# EAGLE board breakoutboard (EAGLE 5.00)
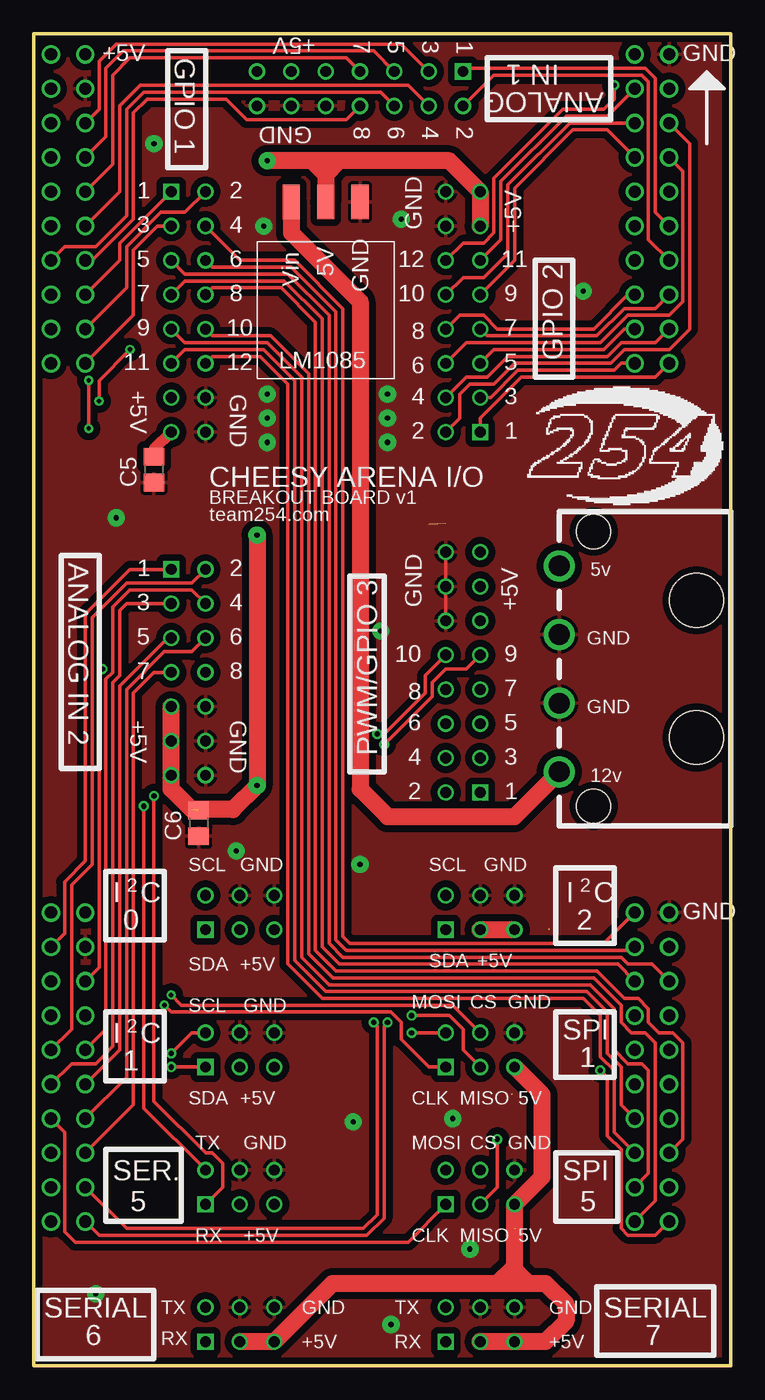
[diagram p0: board, top side]
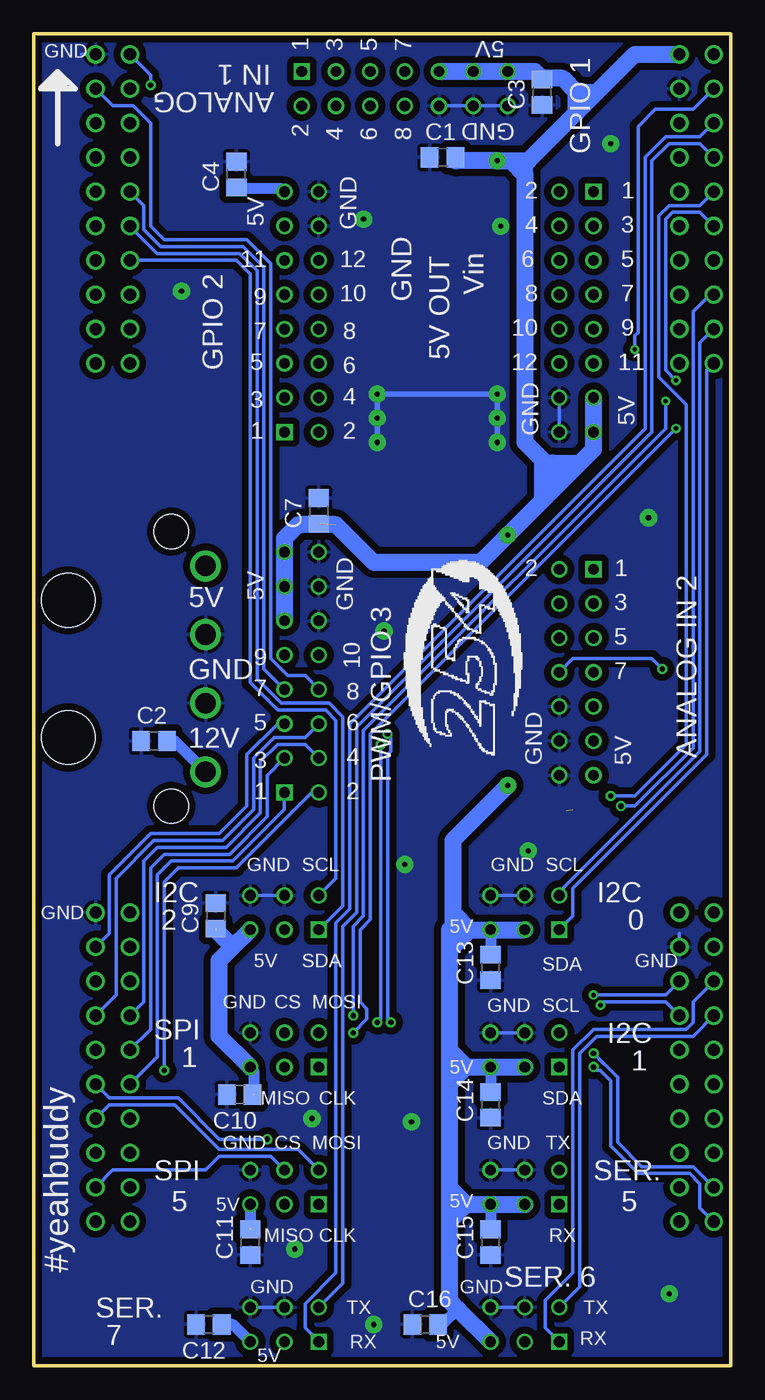
[diagram p1: board, bottom side, seen from below]

Size 51.56 x 98.55 mm. Coordinates in mm from the lower left corner, seen from the top.
Outline: 0,98.55 0,0 51.56,0 51.56,98.55 0,98.55
Copper layers (1*16): Top 0.0356mm / dielectric 1.5011mm / Bottom 0.0356mm
Design rules "LaenPCBOrder *": minimum track width 6mil, minimum drill 13mil, track to track 6mil, track to pad 6mil, pad to pad 6mil, via to via 6mil, smd to smd 6mil, copper to edge 15mil, drill to drill 6mil, minimum pad ring 7mil, minimum via ring 7mil, stop-mask expansion 3mil, vias tented up to drill 16mil, thermal gap 10mil

## Footprints (pad centres in the part's own frame; a part is rotated, then mirrored left to right if it is on the bottom)
C0805 = smd 1.3 x 1.5: 1 -0.95,0; 2 0.95,0
LAUNCHPAD-TM4C1294 = drill 0.9 round: 3V@2 1.27,59.69; 5V@2 3.81,59.69; GND 46.99,123.19; GND@1 3.81,120.65; GND@3 3.81,57.15; GND@4 46.99,59.69; JP4 1.27,49.53; JP5 1.27,46.99; P$21 1.27,100.33; P$22 3.81,100.33; P$23 3.81,102.87; P$24 1.27,102.87; P$25 1.27,105.41; P$26 3.81,105.41; P$27 1.27,107.95; P$28 1.27,110.49; P$29 1.27,113.03; P$30 1.27,115.57; P$31 1.27,118.11; P$32 1.27,120.65; P$33 1.27,123.19; P$34 3.81,123.19; P$36 3.81,118.11; P$37 3.81,115.57; P$38 3.81,113.03; P$39 3.81,110.49; P$40 3.81,107.95; P$42 44.45,100.33; P$52 46.99,100.33; P$53 46.99,102.87; P$54 46.99,105.41; P$55 46.99,107.95; P$56 46.99,110.49; P$57 46.99,113.03; P$58 46.99,115.57; P$59 46.99,118.11; P$60 46.99,120.65; P$72 44.45,123.19; P$73 44.45,120.65; P$74 44.45,118.11; P$75 44.45,115.57; P$76 44.45,113.03; P$77 44.45,110.49; P$78 44.45,107.95; P$79 44.45,105.41; P$80 44.45,102.87; PA4 3.81,39.37; PA5 3.81,36.83; PA7 46.99,52.07; PB4 3.81,54.61; PB5 3.81,52.07; PD2 1.27,57.15; PG1 44.45,59.69; PH0 44.45,44.45; PH1 44.45,41.91; PK0 3.81,49.53; PK1 3.81,46.99; PK2 3.81,44.45; PK3 3.81,41.91; PK4 44.45,57.15; PK5 44.45,54.61; PK6 44.45,39.37; PK7 44.45,36.83; PM0 44.45,52.07; PM1 44.45,49.53; PM2 44.45,46.99; PM6 46.99,36.83; PM7 46.99,57.15; PN4 1.27,36.83; PN5 1.27,39.37; PP0 1.27,54.61; PP1 1.27,52.07; PP3 46.99,41.91; PP4 1.27,41.91; PP5 46.99,54.61; PQ0 1.27,44.45; PQ1 46.99,39.37; R19 46.99,46.99; R20 46.99,44.45; RST@2 46.99,49.53
CONNECTOR_6PIN_FCI_71600-006LF = drill 0.8 round: P$1 0,1.27; P$2 0,-1.27; P$4 -2.54,1.27; P$5 2.54,1.27; P$6 2.54,-1.27 | drill 0.8 square: P$3 -2.54,-1.27
CONNECTOR_14PIN_FCI_71600-014LF = drill 0.8 round: P$1 0,1.27; P$2 2.54,1.27; P$3 5.08,1.27; P$4 7.62,1.27; P$5 7.62,-1.27; P$6 5.08,-1.27; P$7 2.54,-1.27; P$8 0,-1.27; P$9 -2.54,-1.27; P$10 -5.08,-1.27; P$11 -5.08,1.27; P$12 -2.54,1.27; P$13 -7.62,1.27 | drill 0.8 square: P$14 -7.62,-1.27
CONNECTOR_16PIN_FCI_71600-016LF = drill 0.8 round: P$1 -1.27,1.27; P$2 -1.27,-1.27; P$3 -3.81,-1.27; P$4 -3.81,1.27; P$5 1.27,1.27; P$6 1.27,-1.27; P$7 3.81,-1.27; P$8 3.81,1.27; P$9 6.35,1.27; P$10 6.35,-1.27; P$11 8.89,-1.27; P$12 8.89,1.27; P$13 -6.35,1.27; P$14 -6.35,-1.27; P$15 -8.89,1.27 | drill 0.8 square: P$16 -8.89,-1.27
MOLEX_SD-8981-4R1 = drill 1.524 round: P$1 -2.54,0; P$2 2.54,0; P$3 -7.62,0; P$4 7.62,0 | hole 2.54: -10.16,2.54; 10.16,2.54 | hole 3.988: -5.08,10.16; 5.08,10.16
REGULATOR_TI_LM1085 = smd 2.54 x 1.27: 5V -1.27,0; 12V -1.27,2.54; GND -1.27,-2.54

## Placement (x,y rotation side)
C1  15u  [C0805]  21.34,89.41 0 bottom
C2  15u  [C0805]  42.67,46.23 0 bottom
C3  1u  [C0805]  13.97,94.23 90 bottom
C4  1u  [C0805]  36.58,88.14 90 bottom
C5  1u  [C0805]  8.89,66.29 90 top
C6  1u  [C0805]  12.19,40.13 90 top
C7  1u  [C0805]  30.48,63.25 90 bottom
C9  [C0805]  38.1,33.27 90 bottom
C10  [C0805]  36.32,20.07 180 bottom
C11  1u  [C0805]  35.56,9.14 90 bottom
C12  1u  [C0805]  38.61,3.05 180 bottom
C13  1u  [C0805]  17.78,29.46 90 bottom
C14  1u  [C0805]  17.78,19.3 90 bottom
C15  [C0805]  17.78,9.14 90 bottom
C16  1u  [C0805]  22.61,3.05 0 bottom
E$1  [LAUNCHPAD-TM4C1294]  0,-26.16 0 top
E$2  [CONNECTOR_6PIN_FCI_71600-006LF]  15.24,23.37 0 top
E$3  [CONNECTOR_14PIN_FCI_71600-014LF]  24.13,94.49 180 top
E$4  [CONNECTOR_16PIN_FCI_71600-016LF]  31.75,77.98 90 top
E$5  [CONNECTOR_16PIN_FCI_71600-016LF]  11.43,77.98 270 top
E$6  [CONNECTOR_16PIN_FCI_71600-016LF]  31.75,51.31 90 top
E$7  [CONNECTOR_6PIN_FCI_71600-006LF]  33.02,23.37 0 top
E$8  [CONNECTOR_14PIN_FCI_71600-014LF]  11.43,51.31 270 top
E$9  [CONNECTOR_6PIN_FCI_71600-006LF]  15.24,3.05 0 top
E$10  [CONNECTOR_6PIN_FCI_71600-006LF]  33.02,13.21 0 top
E$11  [CONNECTOR_6PIN_FCI_71600-006LF]  33.02,3.05 0 top
E$12  [MOLEX_SD-8981-4R1]  38.86,51.56 270 top
E$13  [CONNECTOR_6PIN_FCI_71600-006LF]  15.24,13.21 0 top
E$14  [REGULATOR_TI_LM1085]  21.59,87.38 90 top
E$15  [LOGO9]  36.58,63.75 0 top
E$16  [CONNECTOR_6PIN_FCI_71600-006LF]  33.02,33.53 0 top
E$17  [CONNECTOR_6PIN_FCI_71600-006LF]  15.24,33.53 0 top
E$18  [LOGO9]  15.49,45.21 90 bottom

## Library data of the parts
C1-C7 C9-C16 = rcl
E$1-E$18 = eyre

## Nets
5V: C1.2 C3.2 C4.1 C5.2 C6.2 C7.1 C9.1 C10.1 C11.2 C12.1 C13.2 C14.2 C15.2 C16.2 E$1.P$34 E$2.P$2 E$2.P$6 E$3.P$5 E$3.P$6 E$3.P$7 E$4.P$10 E$4.P$11 E$5.P$10 E$5.P$11 E$6.P$7 E$6.P$10 E$6.P$11 E$7.P$6 E$8.P$5 E$8.P$6 E$8.P$7 E$9.P$2 E$9.P$6 E$10.P$6 E$11.P$2 E$11.P$6 E$13.P$2 E$13.P$6 E$14.5V E$16.P$2 E$16.P$6 E$17.P$2 E$17.P$6
12V: C2.2 E$12.P$4 E$14.12V
A1: E$1.P$56 E$3.P$14
A2: E$1.P$55 E$3.P$13
A3: E$1.P$36 E$3.P$10
A4: E$1.P$39 E$3.P$11
A5: E$1.P$37 E$3.P$9
A6: E$1.P$27 E$3.P$12
A7: E$1.P$38 E$3.P$8
A8: E$1.P$40 E$3.P$1
A9: E$1.PD2 E$8.P$14
A10: E$1.JP4 E$8.P$13
A11: E$1.JP5 E$8.P$10
A12: E$1.PK0 E$8.P$11
A13: E$1.PK1 E$8.P$9
A14: E$1.PK2 E$8.P$12
A15: E$1.PK3 E$8.P$8
A16/CS1: E$1.PB4 E$7.P$1 E$8.P$1
CLK1: E$1.PB5 E$7.P$3
CLK5: E$1.PQ0 E$10.P$3
CS5: E$1.PQ1 E$10.P$1
GND: C1.1 C2.1 C3.1 C4.2 C5.1 C6.1 C7.2 C9.2 C10.2 C11.1 C12.2 C13.1 C14.1 C15.1 C16.1 E$1.GND E$1.GND@1 E$1.GND@3 E$1.GND@4 E$2.P$1 E$2.P$5 E$3.P$2 E$3.P$3 E$3.P$4 E$4.P$9 E$4.P$12 E$5.P$9 E$5.P$12 E$6.P$8 E$6.P$9 E$6.P$12 E$7.P$5 E$8.P$2 E$8.P$3 E$8.P$4 E$9.P$1 E$9.P$5 E$10.P$5 E$11.P$1 E$11.P$5 E$12.P$1 E$12.P$2 E$13.P$1 E$13.P$5 E$14.GND E$16.P$1 E$16.P$5 E$17.P$1 E$17.P$5
GPIO1: E$1.P$26 E$5.P$16
GPIO2: E$1.P$23 E$5.P$15
GPIO3: E$1.P$22 E$5.P$14
GPIO4: E$1.PG1 E$5.P$13
GPIO5: E$1.PP5 E$5.P$3
GPIO6: E$1.PK4 E$5.P$4
GPIO7: E$1.PK5 E$5.P$2
GPIO8: E$1.PP3 E$5.P$1
GPIO9: E$1.PK6 E$5.P$6
GPIO10: E$1.PK7 E$5.P$5
GPIO11: E$1.PH0 E$5.P$7
GPIO12: E$1.PH1 E$5.P$8
GPIO13: E$1.P$52 E$4.P$16
GPIO14: E$1.P$59 E$4.P$15
GPIO15: E$1.P$42 E$4.P$14
GPIO16: E$1.P$53 E$4.P$13
GPIO17: E$1.P$80 E$4.P$3
GPIO18: E$1.P$58 E$4.P$4
GPIO19: E$1.P$54 E$4.P$2
GPIO20: E$1.P$79 E$4.P$1
GPIO21: E$1.P$75 E$4.P$6
GPIO22: E$1.P$74 E$4.P$5
GPIO23: E$1.P$73 E$4.P$7
GPIO24: E$1.P$72 E$4.P$8
MISO1: E$1.P$32 E$7.P$2
MISO5: E$1.R19 E$10.P$2
MOSI1: E$1.P$28 E$7.P$4
MOSI5: E$1.R20 E$10.P$4
PWM1: E$1.PM2 E$6.P$16
PWM2: E$1.PM6 E$6.P$15
PWM3: E$1.PM1 E$6.P$14
PWM4: E$1.PM0 E$6.P$13
PWM5: E$1.PM7 E$6.P$3
PWM6: E$1.PA7 E$6.P$4
PWM7: E$1.P$76 E$6.P$2
PWM8: E$1.P$60 E$6.P$1
PWM9: E$1.PA5 E$6.P$6
PWM10: E$1.PA4 E$6.P$5
RX5: E$1.P$29 E$13.P$3
RX6: E$1.PP0 E$9.P$3
RX7: E$1.P$31 E$11.P$3
SCL0: E$1.P$24 E$17.P$4
SCL1: E$1.PN5 E$2.P$4
SCL2: E$1.P$78 E$16.P$4
SDA0: E$1.P$21 E$17.P$3
SDA1: E$1.PN4 E$2.P$3
SDA2: E$1.P$77 E$16.P$3
TX5: E$1.P$25 E$13.P$4
TX6: E$1.PP1 E$9.P$4
TX7: E$1.P$30 E$11.P$4

## Tracks (layer width: path | path; a pad name or v marks a point on that pad's centre or on a via)
5V  (via drill 0.38 pad 1.27)  (5 unrouted)
  Top 0.813: C5.2 8.89,67.82 E$5.P$11
  Top 1.27: E$16.P$6 E$16.P$2 | E$11.P$2 E$11.P$6 37.85,1.78 39.37,3.3 39.37,4.57 37.85,6.1 36.58,6.1 | E$7.P$6 37.59,20.07 37.59,13.97 E$10.P$6 35.56,7.37 | 36.58,6.1 35.56,7.11 35.56,7.37 | 35.56,6.1 36.58,6.1 | 35.56,6.1 35.56,7.37 | 34.29,6.1 35.56,6.1 | 34.29,6.1 35.56,7.37 | 34.29,6.1 22.1,6.1 E$9.P$6 E$9.P$2 | v16.51,61.47 v16.51,42.93 14.73,41.15 11.68,41.15 10.16,42.67 E$8.P$5 E$8.P$6 E$8.P$7 | 21.59,88.14 E$14.5V | 20.57,89.15 21.59,88.14 | 20.57,89.15 v17.27,89.15 | 22.61,89.15 20.57,89.15 | 22.61,89.15 21.59,88.14 | 22.61,89.15 30.73,89.15 E$4.P$11 E$4.P$10
  Bottom 0.813: C12.1 36.83,3.05 E$11.P$6 | 35.31,20.07 35.31,21.84 E$7.P$6 | E$10.P$6 35.56,10.16 | C16.2 21.34,3.05 20.19,4.19 | E$13.P$6 C15.2 | E$2.P$6 C14.2 | E$17.P$6 C13.2 | E$4.P$11 33.27,87.12 36.58,87.12 C4.1
  Bottom 1.27: 36.83,30.99 E$16.P$6 | 36.83,30.99 38.1,32.26 | 36.83,30.99 37.85,29.97 37.85,24.38 E$7.P$6 | E$9.P$6 20.19,4.19 20.83,4.83 20.83,10.67 | E$13.P$2 E$13.P$6 19.56,11.94 | 19.56,11.94 20.83,10.67 | 20.83,11.94 20.83,10.67 | 20.83,11.94 19.56,11.94 | 20.83,13.21 20.83,11.94 | 20.83,13.21 19.56,11.94 | E$2.P$2 E$2.P$6 19.56,22.1 | 20.83,20.83 20.83,13.21 | 20.83,22.1 20.83,20.83 | 19.56,22.1 20.83,22.1 | 19.56,22.1 20.83,20.83 | E$6.P$7 E$6.P$10 E$6.P$11 33.02,61.21 32,62.23 29.21,62.23 26.42,59.44 18.54,59.44 v16.51,61.47 13.97,64.01 | 20.83,23.37 19.56,22.1 | 20.83,23.37 20.83,22.1 | 20.83,30.73 20.83,23.37 | E$17.P$2 E$17.P$6 19.3,32.26 | 20.83,30.73 20.83,32.26 19.3,32.26 | 19.3,32.26 20.83,30.73 | 20.57,33.53 20.57,32 | 20.57,33.53 19.3,32.26 | E$5.P$10 E$5.P$11 10.16,67.82 11.18,66.8 | E$3.P$7 E$3.P$6 E$3.P$5 14.48,95.76 13.97,95.25 | 20.57,33.53 20.57,38.86 v16.51,42.93 | 11.18,66.8 13.21,64.77 | 13.97,95.25 C3.2 | E$1.P$34 7.11,97.03 9.91,94.23 | 13.21,66.8 11.18,66.8 | 13.21,66.8 13.21,64.77 | 13.72,64.26 13.21,64.77 | 13.97,64.01 13.72,64.26 | 13.72,66.8 13.21,66.8 | 13.72,66.8 13.72,64.26 | 13.97,95.25 12.45,95.25 11.43,94.23 | 11.43,94.23 9.91,94.23 | 10.67,93.47 9.91,94.23 | 10.67,93.47 11.43,94.23 | 13.97,67.06 13.72,66.8 | 13.97,67.06 13.97,64.01 | 13.97,67.06 15.24,68.33 15.24,88.14 | 11.43,92.71 10.67,93.47 | 11.43,92.71 11.43,94.23 | 14.99,89.15 15.24,88.9 15.24,88.14 | 14.99,89.15 11.43,92.71 | C1.2 20.39,89.22 20.32,89.15 v17.27,89.15 16.26,89.15 | 16.26,89.15 15.24,88.14 | 16.26,89.15 14.99,89.15
12V
  Top 1.27: E$14.12V 19.05,83.82 24.13,78.74 24.13,42.67 26.16,40.64 35.56,40.64 E$12.P$4
  Bottom 0.813: C2.2 41.15,46.23 E$12.P$4
A1
  Top 0.254: E$1.P$56 45.97,85.34 45.97,95.25 45.21,96.01 32,96.01 E$3.P$14
A2
  Top 0.254: E$1.P$55 45.47,83.31 45.47,95 44.96,95.5 34.04,95.5 E$3.P$13
A3
  Top 0.254: E$1.P$36 4.83,92.96 4.83,96.52 6.1,97.79 27.18,97.79 E$3.P$10
A4
  Top 0.254: E$1.P$39 6.35,86.87 6.35,93.22 7.87,94.74 27.69,94.74 E$3.P$11
A5
  Top 0.254: E$3.P$9 25.15,97.28 6.6,97.28 5.33,96.01 5.33,90.93 E$1.P$37
A6
  Top 0.254: E$1.P$27 2.29,82.8 4.57,82.8 6.86,85.09 6.86,92.96 8.13,94.23 25.65,94.23 E$3.P$12
A7
  Top 0.254: E$3.P$8 23.11,96.77 7.11,96.77 5.84,95.5 5.84,88.9 E$1.P$38
A8
  Top 0.254: E$1.P$40 4.32,81.79 7.37,84.84 7.37,92.71 8.38,93.73 14.22,93.73 15.75,92.2 23.11,92.2 E$3.P$1
A9
  Top 0.254: E$1.PD2 2.29,32 2.29,35.81 3.81,37.34 3.81,55.63 7.11,58.93 E$8.P$14
A10
  Top 0.254: E$1.JP4 2.79,24.89 2.79,35.56 4.32,37.08 4.32,55.37 6.86,57.91 11.68,57.91 E$8.P$13
A11
  Top 0.254: E$1.JP5 2.79,22.35 4.57,22.35 5.84,23.62 5.84,50.55 6.35,51.05 6.35,55.88 6.86,56.39 E$8.P$10
A12
  Top 0.254: E$1.PK0 5.33,24.89 5.33,50.8 5.84,51.31 5.84,56.13 7.11,57.4 11.68,57.4 E$8.P$11
A13
  Top 0.254: E$1.PK1 6.35,23.37 6.35,50.29 9.91,53.85 E$8.P$9
A14
  Top 0.254: E$1.PK2 6.86,21.34 6.86,50.04 9.65,52.83 11.68,52.83 E$8.P$12
A15
  Top 0.254: E$8.P$8 8.89,51.31 7.37,49.78 7.37,19.3 E$1.PK3
A16/CS1  (via drill 0.33, 0.38)
  Top 0.254: E$7.P$1 30.99,26.67 10.92,26.67 v10.16,27.43 | E$1.PB4 4.83,29.46 4.83,51.31 v5.08,51.56
  Bottom 0.254: v10.16,27.43 4.83,27.43 E$1.PB4 | v5.08,51.56 5.84,52.32 11.68,52.32 E$8.P$1
CLK1  (via drill 0.33)
  Top 0.254: E$7.P$3 29.21,22.1 27.18,24.13 27.18,25.4 26.42,26.16 10.16,26.16 v9.65,26.67
  Bottom 0.254: E$1.PB5 4.83,26.92 9.4,26.92 v9.65,26.67
CLK5
  Top 0.254: E$10.P$3 27.69,9.14 3.05,9.14 2.29,9.91 2.29,17.27 E$1.PQ0
CS5
  Bottom 0.254: E$1.PQ1 45.72,14.48 38.86,14.48 37.85,15.49 34.04,15.49 E$10.P$1
GND  (via drill 0.38 pad 1.27)
  Top 0.254: E$6.P$12 E$6.P$9 E$6.P$8
  Bottom 0.254: 39.37,54.1 E$12.P$1 | 39.37,49.02 E$12.P$2 | E$1.GND@4 47.24,33.53 | E$10.P$5 36.07,14.48 | 36.07,4.32 E$11.P$5 E$11.P$1 | 17.78,4.57 E$9.P$5 E$9.P$1 | 17.78,14.73 E$13.P$5 E$13.P$1 | 17.78,24.89 E$2.P$5 E$2.P$1 | E$17.P$5 E$17.P$1 | E$5.P$9 E$5.P$12 | E$3.P$4 E$3.P$3 E$3.P$2 | E$1.GND 48.01,97.03 | E$1.GND@3 3.81,32 | 35.56,25.15 E$7.P$5 | 35.56,35.31 E$16.P$5 E$16.P$1
  Bottom 0.406: v17.27,68.33 v17.27,70.1 v17.27,71.88 v26.16,71.88 v26.16,70.1 v26.16,68.33
  other vias: 40.64,79.5 30.99,18.29 4.57,5.33 25.65,54.36 6.1,62.74 8.89,90.42 17.02,84.33 27.18,84.84 32.26,8.64 26.42,3.05 14.99,38.1 23.62,18.03 24.13,37.08
  pour Bottom (isolate 0.508): 0,98.55 51.56,98.55 51.56,95 51.56,0 0,0
  pour Top (isolate 0.508): 0,0 51.56,0 51.56,98.55 0,98.55
GPIO1
  Top 0.254: E$1.P$26 6.35,81.79 6.35,83.06 E$5.P$16
GPIO2
  Top 0.254: E$1.P$23 6.86,79.76 6.86,82.8 9.4,85.34 11.18,85.34 E$5.P$15
GPIO3
  Top 0.254: E$1.P$22 7.37,77.72 7.37,82.55 9.14,84.33 E$5.P$14
GPIO4
  Top 0.254: E$1.PG1 42.16,31.24 23.37,31.24 22.86,31.75 22.86,78.23 19.3,81.79 15.24,81.79 E$5.P$13
GPIO5
  Top 0.254: E$1.PP5 45.72,29.72 43.94,29.72 43.43,30.23 22.86,30.23 21.84,31.24 21.84,77.72 18.8,80.77 11.18,80.77 E$5.P$3
GPIO6
  Top 0.254: E$1.PK4 44.2,30.73 23.11,30.73 22.35,31.5 22.35,77.98 19.05,81.28 13.21,81.28 E$5.P$4
GPIO7
  Top 0.254: E$1.PK5 43.18,29.72 22.61,29.72 21.34,30.99 21.34,77.47 18.54,80.26 11.18,80.26 E$5.P$2
GPIO8
  Top 0.254: E$1.PP3 48.01,16.76 48.01,23.88 47.24,24.64 46.23,24.64 45.47,25.4 45.47,26.42 44.7,27.18 43.69,27.18 41.66,29.21 22.35,29.21 20.83,30.73 20.83,77.22 18.29,79.76 13.21,79.76 E$5.P$1
GPIO9
  Top 0.254: E$1.PK6 45.47,14.22 45.47,21.84 44.96,22.35 43.94,22.35 42.93,23.37 42.93,26.42 41.15,28.19 21.84,28.19 19.81,30.23 19.81,73.15 17.27,75.69 11.18,75.69 E$5.P$6
GPIO10
  Top 0.254: E$1.PK7 45.97,12.19 45.97,23.88 45.21,24.64 44.2,24.64 43.43,25.4 43.43,26.67 41.4,28.7 22.1,28.7 20.32,30.48 20.32,73.41 17.53,76.2 13.21,76.2 E$5.P$5
GPIO11
  Top 0.254: E$1.PH0 43.43,19.3 43.43,22.1 42.42,23.11 42.42,26.16 40.89,27.69 21.59,27.69 19.3,29.97 19.3,72.9 17.02,75.18 11.18,75.18 E$5.P$7
GPIO12
  Top 0.254: E$1.PH1 42.93,17.27 42.93,21.84 41.91,22.86 41.91,25.91 40.64,27.18 21.34,27.18 18.8,29.72 18.8,72.64 16.76,74.68 13.21,74.68 E$5.P$8
GPIO13
  Top 0.254: E$1.P$52 45.97,73.15 36.07,73.15 33.02,70.1 E$4.P$16
GPIO14
  Top 0.254: E$4.P$15 31.5,70.1 31.5,71.88 32.26,72.64 34.04,72.64 35.56,74.17 42.67,74.17 43.69,75.18 46.99,75.18 48.51,76.71 48.51,90.42 E$1.P$59
GPIO15
  Top 0.254: E$1.P$42 43.43,74.17 42.93,73.66 35.81,73.66 33.78,71.63 E$4.P$14
GPIO16
  Top 0.254: E$1.P$53 45.97,75.69 43.43,75.69 42.42,74.68 35.05,74.68 33.53,73.15 32,73.15 E$4.P$13
GPIO17
  Top 0.254: E$1.P$80 43.69,76.71 42.16,75.18 34.04,75.18 E$4.P$3
GPIO18
  Top 0.254: E$4.P$4 32,75.69 41.91,75.69 43.94,77.72 45.21,77.72 | E$1.P$58 48.01,88.39 48.01,78.74 46.99,77.72 45.21,77.72 | 45.21,77.72 45.47,77.72
GPIO19
  Top 0.254: E$1.P$54 45.97,78.23 43.69,78.23 41.66,76.2 33.53,76.2 E$4.P$2
GPIO20
  Top 0.254: E$1.P$79 43.94,79.25 41.4,76.71 34.29,76.71 33.27,77.72 31.5,77.72 E$4.P$1
GPIO21
  Top 0.254: E$1.P$75 42.42,91.44 39.88,91.44 35.56,87.12 35.56,81.79 E$4.P$6
GPIO22
  Top 0.254: E$1.P$74 39.62,91.95 35.05,87.38 35.05,82.3 33.27,80.52 31.75,80.52 E$4.P$5
GPIO23
  Top 0.254: E$1.P$73 42.42,92.46 39.37,92.46 34.54,87.63 34.54,83.31 E$4.P$7
GPIO24  (via drill 0.38)
  Top 0.254: v42.93,94.74 42.93,93.73 42.16,92.96 39.12,92.96 34.04,87.88 34.04,83.82 33.27,83.06 31.75,83.06 E$4.P$8
  Bottom 0.254: v42.93,94.74 42.93,95.5 E$1.P$72
MISO1  (via drill 0.33, 0.38)
  Top 0.254: E$7.P$2 31.75,23.37 31.75,24.89 30.73,25.91 v27.94,25.91 | v4.83,71.37 4.83,72.9 v7.11,75.18
  Bottom 0.254: v27.94,25.91 27.94,32.51 27.18,33.27 27.18,46.99 4.83,69.34 v4.83,71.37 | E$1.P$32 2.79,92.96 5.59,92.96 6.86,91.69 6.86,76.45 7.11,76.2 v7.11,75.18
MISO5  (via drill 0.38 pad 0.41)
  Top 0.254: E$10.P$2 34.29,13.21 v34.29,16.76
  Bottom 0.254: E$1.R19 45.97,19.81 40.89,19.81 37.85,16.76 v34.29,16.76
MOSI1  (via drill 0.33, 0.38)
  Top 0.254: v4.06,72.9 v4.06,69.34 | v27.94,24.64 E$7.P$4
  Bottom 0.254: E$1.P$28 2.29,85.34 4.32,85.34 4.83,84.84 4.83,73.66 v4.06,72.9 | v27.94,24.64 26.92,25.65 26.92,26.42 27.43,26.92 27.43,32.26 26.67,33.02 26.67,46.74 v4.06,69.34
MOSI5
  Bottom 0.254: E$1.R20 45.97,19.3 41.15,19.3 37.85,16 32,16 E$10.P$4
PWM1
  Bottom 0.254: E$6.P$16 33.02,41.15 36.83,37.34 41.4,37.34 42.42,36.32 42.42,22.86 E$1.PM2
PWM2  (via drill 0.38)
  Top 0.254: E$1.PM6 45.97,9.65 43.94,9.65 43.43,10.16 43.43,16 42.42,17.02 42.42,21.34 v41.91,21.84
  Bottom 0.254: E$6.P$15 30.99,42.42 36.58,36.83 40.89,36.83 41.91,35.81 v41.91,21.84
PWM3
  Bottom 0.254: E$1.PM1 42.93,24.89 42.93,36.83 41.91,37.85 37.08,37.85 34.29,40.64 34.29,43.69 E$6.P$14
PWM4
  Bottom 0.254: E$6.P$13 31.5,45.97 33.53,45.97 34.8,44.7 34.8,40.89 37.34,38.35 42.42,38.35 43.43,37.34 43.43,26.92 E$1.PM0
PWM5
  Bottom 0.254: E$6.P$3 33.53,47.5 35.81,45.21 35.81,41.4 37.85,39.37 42.93,39.37 45.97,36.32 45.97,32 E$1.PM7
PWM6
  Bottom 0.254: E$6.P$4 31.5,46.48 33.78,46.48 35.31,44.96 35.31,41.15 37.59,38.86 42.67,38.86 45.47,36.07 45.47,27.43 E$1.PA7
PWM7
  Bottom 0.254: E$6.P$2 34.54,51.56 34.54,81.28 36.07,82.8 42.16,82.8 43.43,84.07 43.43,85.85 E$1.P$76
PWM8
  Bottom 0.254: E$6.P$1 31.5,51.05 32.77,51.05 34.04,52.32 34.04,81.53 35.81,83.31 41.91,83.31 42.93,84.33 42.93,91.95 44.2,93.22 45.72,93.22 E$1.P$60
PWM9  (via drill 0.38)
  Top 0.254: v25.91,45.97 29.46,49.53 29.46,50.55 30.48,51.56 32,51.56 E$6.P$6 | E$1.PA5 4.83,9.65 24.64,9.65 25.91,10.92 25.91,25.15 v26.16,25.4
  Bottom 0.254: v26.16,25.4 25.91,25.65 v25.91,45.97
PWM10  (via drill 0.38)
  Top 0.254: v25.4,46.74 25.91,46.74 28.96,49.78 28.96,51.05 E$6.P$5 | E$1.PA4 6.86,10.16 24.38,10.16 25.4,11.18 25.4,25.15 v25.15,25.4
  Bottom 0.254: v25.15,25.4 25.4,25.65 25.4,45.21 25.15,45.47 25.15,46.48 v25.4,46.74
RX5  (via drill 0.38)
  Top 0.254: E$13.P$3 13.97,13.21 13.97,14.99 13.21,15.75 12.7,15.75 8.89,19.56 v8.89,42.16
  Bottom 0.254: v8.89,42.16 7.11,42.16 3.3,45.97 3.3,71.12 5.33,73.15 5.33,85.09 4.57,85.85 2.29,85.85 E$1.P$29
RX6
  Bottom 0.254: E$1.PP0 2.79,26.92 2.79,25.4 3.3,24.89 10.16,24.89 11.68,23.37 11.68,6.86 13.72,4.83 13.72,2.79 E$9.P$3
RX7
  Bottom 0.254: E$11.P$3 31.5,2.79 31.5,4.57 29.21,6.86 29.21,32.77 28.19,33.78 28.19,47.5 6.35,69.34 6.35,89.41 4.83,90.93 2.29,90.93 E$1.P$31
SCL0
  Bottom 0.254: E$1.P$24 2.29,75.69 2.29,45.47 12.7,35.05 E$17.P$4
SCL1  (via drill 0.38)
  Top 0.254: v10.16,23.11 11.68,24.64 E$2.P$4
  Bottom 0.254: E$1.PN5 2.79,14.73 6.6,14.73 8.38,16.51 8.38,21.34 v10.16,23.11 9.4,22.35
SCL2
  Bottom 0.254: E$16.P$4 29.21,36.07 29.21,47.75 29.97,48.51 33.53,48.51 35.56,50.55 35.56,80.77 36.58,81.79 E$1.P$78
SDA0
  Bottom 0.254: E$1.P$21 1.78,73.66 1.78,45.21 11.68,35.31 11.68,33.27 E$17.P$3
SDA1  (via drill 0.38)
  Top 0.254: E$2.P$3 v10.16,22.1
  Bottom 0.254: v10.16,22.1 9.91,21.84 9.65,21.84 8.89,21.08 8.89,16.26 6.86,14.22 3.05,14.22 2.29,13.46 2.29,11.68 E$1.PN4
SDA2
  Bottom 0.254: E$16.P$3 28.7,34.04 28.7,48.01 29.72,49.02 33.27,49.02 35.05,50.8 35.05,81.03 36.32,82.3 42.42,82.3 E$1.P$77
TX5  (via drill 0.38)
  Top 0.254: E$13.P$4 8.13,19.05 v8.13,41.4
  Bottom 0.254: v8.13,41.4 7.11,41.4 2.79,45.72 2.79,77.98 1.52,79.25 E$1.P$25
TX6
  Bottom 0.254: E$1.PP1 2.79,24.38 9.91,24.38 11.18,23.11 11.18,5.84 E$9.P$4
TX7
  Bottom 0.254: E$1.P$30 2.29,90.42 4.57,90.42 5.84,89.15 5.84,69.09 27.69,47.24 27.69,33.53 28.7,32.51 28.7,6.1 E$11.P$4

## Text on the board
tPlace: +5V | 7 | 5 | 3 | 1 | +5V | GPIO 1 | IN 1 | GND | ANALOG | GND | 8 | 6 | 4 | 2 | 1 | 2 | 3 | 4 | GND | +5V | 5 | 6 | 12 | 11 | GPIO 2 | 7 | 8 | 10 | 9 | 9 | 10 | 8 | 7 | 11 | 12 | 6 | 5 | +5V | GND | 4 | 3 | 2 | 1 | CHEESY ARENA I/O | BREAKOUT BOARD v1 | team254.com | ANALOG IN 2 | 1 | 2 | PWM/GPIO 3 | 5v | 3 | 4 | GND | +5V | 5 | 6 | GND | 10 | 9 | 7 | 8 | 8 | 7 | GND | +5V | GND | 6 | 5 | 4 | 3 | 12v | 2 | 1 | SCL | GND | SCL | GND | 2 | 2 | I | C | I | C | GND | 0 | 2 | SDA | +5V | SDA | +5V | SCL | GND | MOSI | CS | GND | I | 2 | C | SPI | 1 | 1 | SDA | +5V | CLK | MISO | 5V | TX | GND | MOSI | CS | GND | SER. | SPI | 5 | 5 | RX | +5V | CLK | MISO | 5V | TX | GND | TX | GND | SERIAL | SERIAL | 6 | RX | +5V | RX | +5V | 7
bPlace: 5V | 7 | 5 | 3 | 1 | IN 1 | GND | ANALOG | GND | 2 | 8 | 6 | 4 | GPIO 1 | 1 | 2 | 3 | 4 | GND | 5V | 5 | 6 | 12 | 11 | Vin | 7 | 8 | GND | 10 | 9 | 9 | 10 | 8 | 7 | 5V OUT | 11 | 12 | 6 | 5 | GPIO 2 | 4 | 3 | 5V | GND | 2 | 1 | 1 | 2 | 3 | GND | 5V | 5V | 5 | 9 | 7 | 10 | 7 | GND | 8 | 5 | 6 | ANALOG IN 2 | 3 | 12V | 5V | GND | 4 | PWM/GPIO 3 | 1 | 2 | SCL | GND | SCL | GND | I2C | I2C | GND | 0 | 5V | 2 | GND | SDA | SDA | 5V | SCL | GND | MOSI | CS | GND | I2C | SPI | 1 | 1 | 5V | SDA | CLK | MISO | TX | GND | MOSI | CS | GND | SER. | SPI | 5 | 5V | 5V | 5 | RX | CLK | MISO | #yeahbuddy | SER. 6 | GND | GND | TX | TX | SER. | RX | 5V | RX | 7 | 5V